# EAGLE board board (EAGLE 9.5.1)
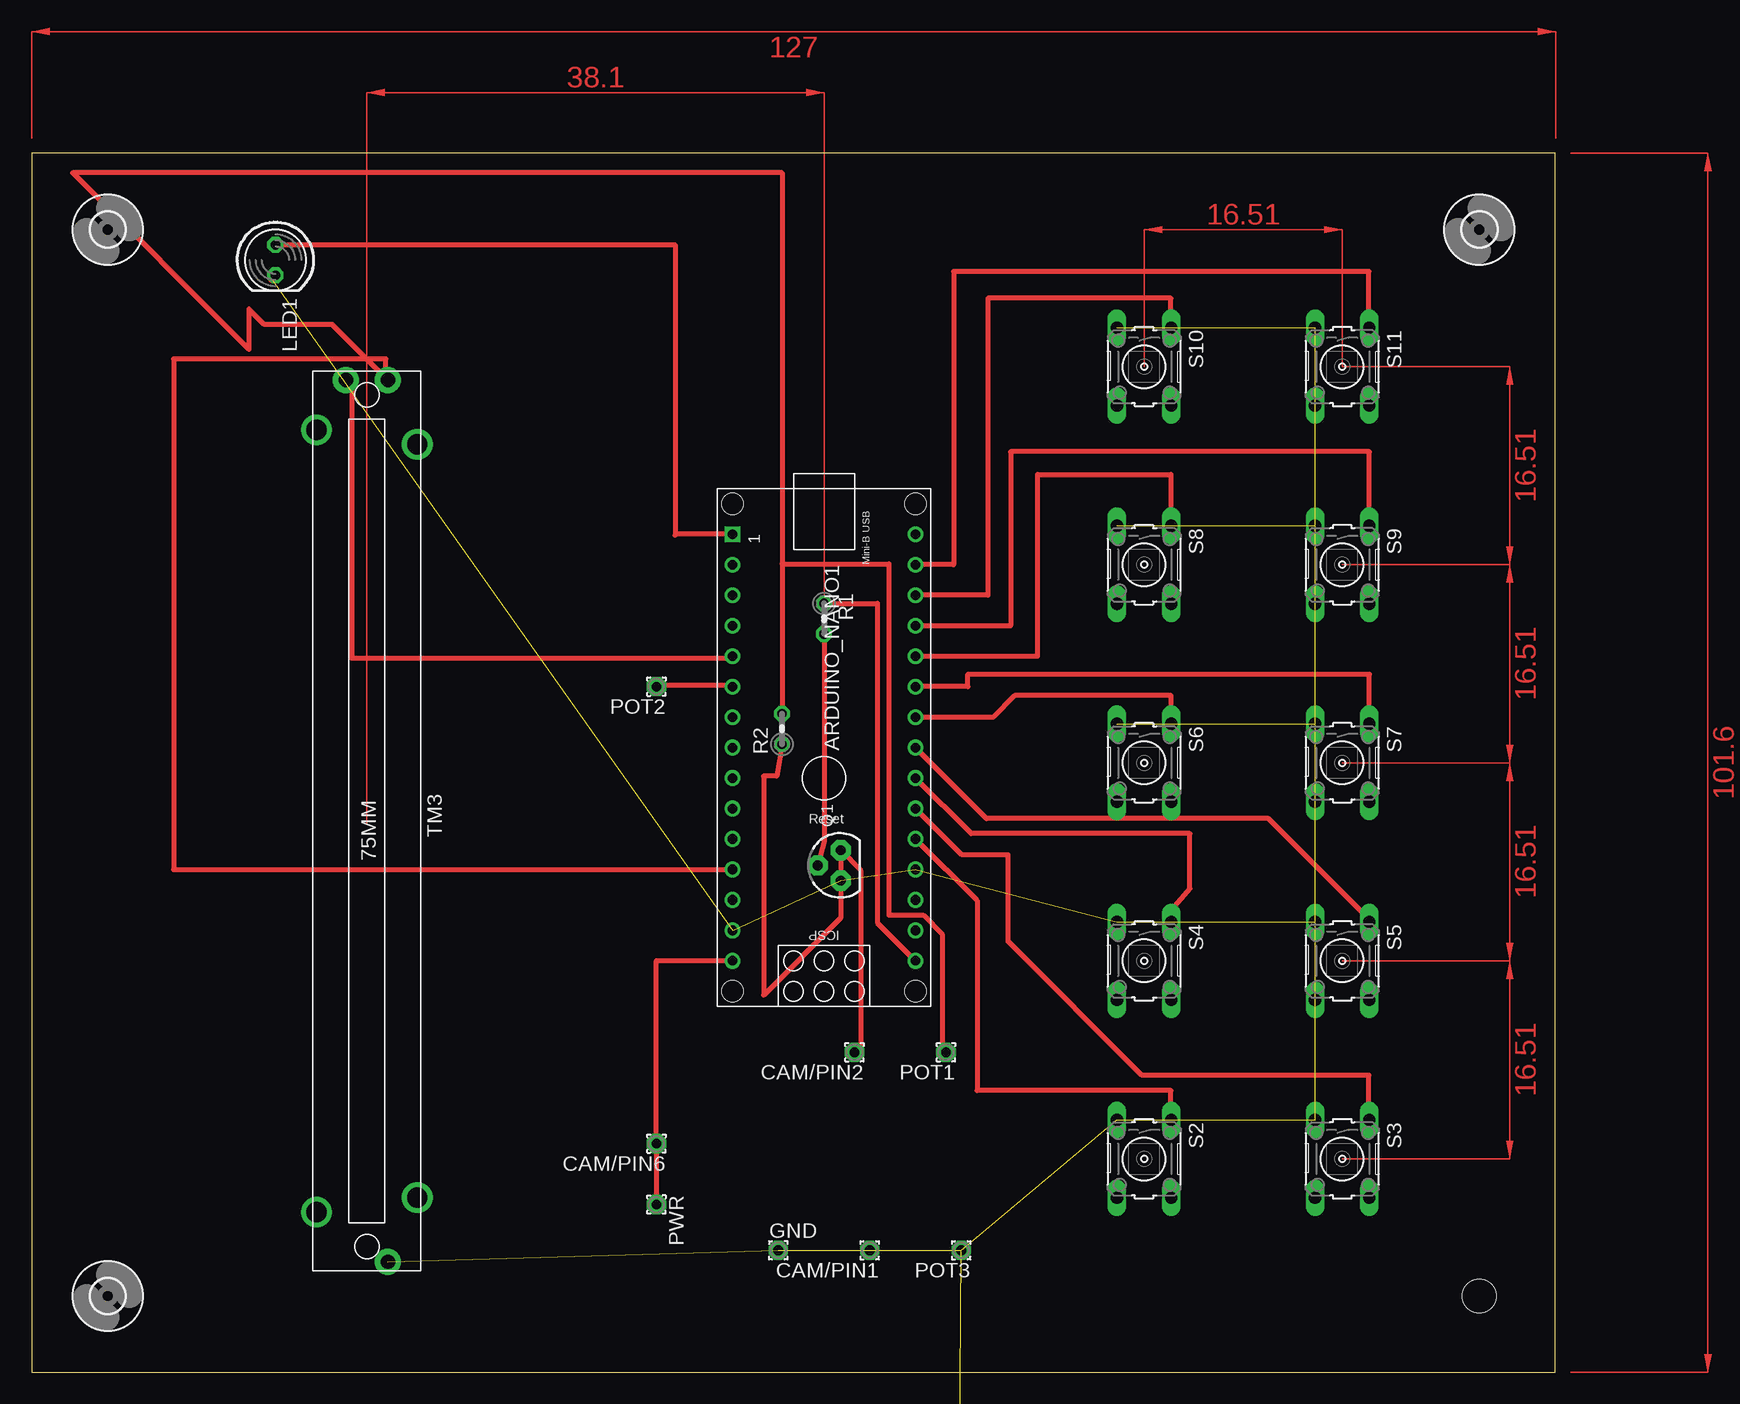
[diagram p0: board, top side]
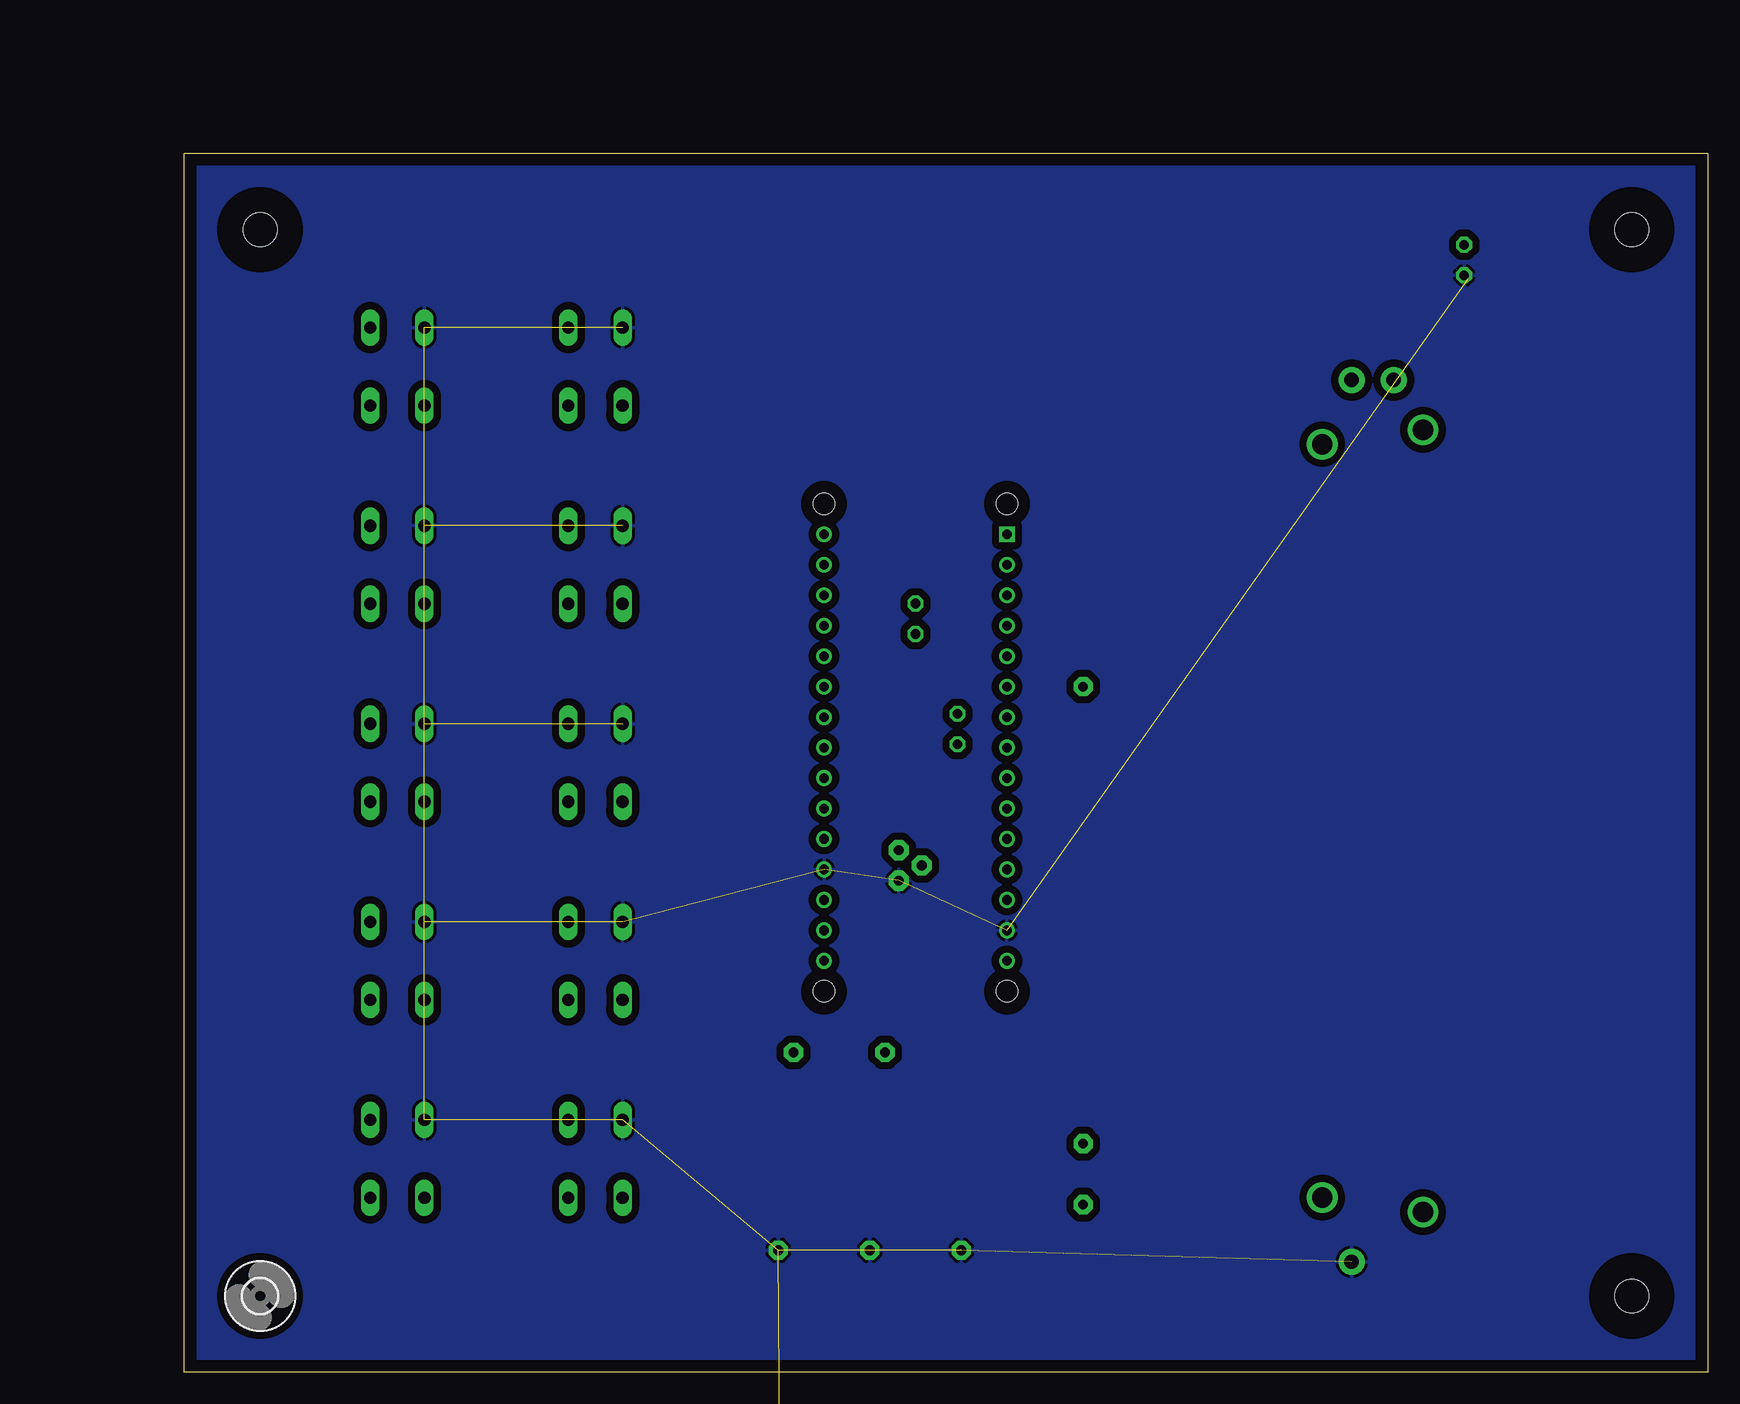
[diagram p1: board, bottom side, seen from below]

Size 126.98 x 101.6 mm. Coordinates in mm from the lower left corner, seen from the top.
Outline: 0,0 126.98,0 126.98,101.6 0,101.6 0,0
Copper layers (1*16): Top 0.035mm / dielectric 1.5mm / Bottom 0.035mm
Design rules "default": minimum track width 6mil, minimum drill 0.35mm, track to track 6mil, track to pad 6mil, pad to pad 6mil, via to via 6mil, smd to smd 6mil, copper to edge 40mil, drill to drill 6mil, minimum pad ring 10mil, minimum via ring 8mil, stop-mask expansion 4mil, vias tented up to drill 0mil, thermal gap 10mil
Net classes: 0 default: width 0.406 mm, clearance 0.406 mm; 1 ground: width 0.61 mm, clearance 0.61 mm

## Footprints (pad centres in the part's own frame; a part is rotated, then mirrored left to right if it is on the bottom)
ARDUINO_NANO = drill 0.8 square: 1 -20.32,-7.62 | drill 0.8: 2 -17.78,-7.62; 3 -15.24,-7.62; 4 -12.7,-7.62; 5 -10.16,-7.62; 6 -7.62,-7.62; 7 -5.08,-7.62; 8 -2.54,-7.62; 9 0,-7.62; 10 2.54,-7.62; 11 5.08,-7.62; 12 7.62,-7.62; 13 10.16,-7.62; 14 12.7,-7.62; 15 15.24,-7.62; 16 15.24,7.62; 17 12.7,7.62; 18 10.16,7.62; 19 7.62,7.62; 20 5.08,7.62; 21 2.54,7.62; 22 0,7.62; 23 -2.54,7.62; 24 -5.08,7.62; 25 -7.62,7.62; 26 -10.16,7.62; 27 -12.7,7.62; 28 -15.24,7.62; 29 -17.78,7.62; 30 -20.32,7.62 | hole 1.778: -22.86,-7.62; -22.86,7.62; 17.78,7.62; 17.78,-7.62
1,6/0,8 = drill 0.813 pad 1.6 octagon: 1 0,0
D-25F = drill 1.016 pad 1.575 octagon: 1 16.764,1.397; 2 13.97,1.397; 3 11.176,1.397; 4 8.382,1.397; 5 5.588,1.397; 6 2.794,1.397; 7 0,1.397; 8 -2.794,1.397; 9 -5.588,1.397; 10 -8.382,1.397; 11 -11.176,1.397; 12 -13.97,1.397; 13 -16.764,1.397; 14 15.367,-1.397; 15 12.573,-1.397; 16 9.779,-1.397; 17 6.985,-1.397; 18 4.191,-1.397; 19 1.397,-1.397; 20 -1.397,-1.397; 21 -4.191,-1.397; 22 -6.985,-1.397; 23 -9.779,-1.397; 24 -12.573,-1.397; 25 -15.367,-1.397 | hole 4.115: 23.368,0; -23.368,0
LED5MM = drill 0.813 octagon: A -1.27,0; K 1.27,0
TO92 = drill 0.813 pad 1.676 octagon: 1 1.27,0; 2 0,1.905; 3 -1.27,0
0204V = drill 0.813 octagon: 1 -1.27,0; 2 1.27,0
47100226814X_PANELTHICKNESS1.5MM = drill 0.8: 1 3,0; 2 -3,0
B3F-10XX = drill 1.016 long: 1 -3.251,2.261; 2 3.251,2.261; 3 -3.251,-2.261; 4 3.251,-2.261
SLIDEPOT-75 = drill 1.2 pad 2.184: A -36.99,1.75; B 36.514,1.75; WIPER -36.99,-1.75 | drill 1.7 pad 2.54: P$1 -31.64,4.2; P$2 31.164,4.2; P$3 -32.84,-4.2; P$4 32.364,-4.2
2,8 = hole 2.8: 0,0
DIN8 = drill 0.6 square: P$1 -1.27,0; P$2 0,0; P$3 1.27,0; P$4 2.54,0; P$5 2.54,-1.27; P$6 1.27,-1.27; P$7 0,-1.27; P$8 -1.27,-1.27

## Placement (x,y rotation side)
ARDUINO_NANO1  [ARDUINO_NANO]  66.04,49.53 270 top
CAM/PIN1  [1,6/0,8]  69.85,10.16 180 top
CAM/PIN2  [1,6/0,8]  68.58,26.67 180 top
CAM/PIN6  [1,6/0,8]  52.07,19.05 180 top
CON1  [D-25F]  40.12,-12.86 0 top  (outside the outline)
GND  [1,6/0,8]  62.23,10.16 0 top
LED1  [LED5MM]  20.32,92.71 270 top
POT1  [1,6/0,8]  76.2,26.67 180 top
POT2  [1,6/0,8]  52.07,57.15 180 top
POT3  [1,6/0,8]  77.47,10.16 180 top
PWR  [1,6/0,8]  52.07,13.97 270 top
Q1  MPSA42  [TO92]  67.43,42.25 90 top
R1  [0204V]  66.04,62.81 270 top
R2  [0204V]  62.54,53.62 90 top
S1  471002268142_PANELTHICKNESS1.5MM  [47100226814X_PANELTHICKNESS1.5MM]  80.23,-22.63 0 top  (outside the outline)
S2  [B3F-10XX]  92.71,17.78 270 top
S3  [B3F-10XX]  109.22,17.78 270 top
S4  [B3F-10XX]  92.71,34.29 270 top
S5  [B3F-10XX]  109.22,34.29 270 top
S6  [B3F-10XX]  92.71,50.8 270 top
S7  [B3F-10XX]  109.22,50.8 270 top
S8  [B3F-10XX]  92.71,67.31 270 top
S9  [B3F-10XX]  109.22,67.31 270 top
S10  [B3F-10XX]  92.71,83.82 270 top
S11  [B3F-10XX]  109.22,83.82 270 top
TM3  [SLIDEPOT-75]  27.94,45.72 270 top
U$1  [2,8]  6.35,95.25 0 top
U$2  [2,8]  6.35,6.35 0 top
U$3  [2,8]  120.65,95.25 0 top
U$4  [2,8]  120.65,6.35 0 bottom
X1  DIN8  [DIN8]  4.11,-12.6 0 top  (outside the outline)
X2  DIN8  [DIN8]  4.11,-9.77 0 top  (outside the outline)

## Library data of the parts
ARDUINO_NANO1 = ArduinoNanoV30
CAM/PIN1 CAM/PIN2 CAM/PIN6 GND POT1-POT3 PWR = wirepad
CON1 = db25
LED1 = led
Q1 = MPSA42; AVAILABILITY: Unavailable; DESCRIPTION: TRANSISTOR, NPN, TO-92; Transistor Type: Bipolar; Transistor Polarity: NPN; Collector-to-Emitter Breakdown Voltage: 3...; MF: Central Semiconductor; MP: MPSA42; PACKAGE: TO-92 Multicomp; PRICE: None
R1 R2 = rcl; SPICEPREFIX: R
S1 = power_switch; AVAILABILITY: Unavailable; DESCRIPTION: Rocker Switch SPST 10A _AC/DC_ 250V Panel Mount, Snap-In; MF: Würth Elektronik; MP: 471002268142; PACKAGE: None; PRICE: None
S2-S11 = switch-omron; MPN: B3F-1000; OC_FARNELL: 176432; OC_NEWARK: 36M3542
TM3 = Bourns PTA series
U$1-U$4 = holes
X1 X2 = con-din8

## Nets
GND [ground]: ARDUINO_NANO1.14 ARDUINO_NANO1.19 CAM/PIN1.1 GND.1 LED1.K POT3.1 Q1.3 S1.2 S2.3 S3.3 S4.3 S5.3 S6.3 S7.3 S8.3 S9.3 S10.3 S11.3 TM3.B
N$1: X1.P$7
N$2: ARDUINO_NANO1.12 POT1.1 R2.2 TM3.A
N$3: ARDUINO_NANO1.20 S2.1
N$4: ARDUINO_NANO1.21 S3.1
N$5: ARDUINO_NANO1.22 S4.1
N$6: ARDUINO_NANO1.23 S5.1
N$7: ARDUINO_NANO1.24 S6.1
N$8: ARDUINO_NANO1.25 S7.1
N$9: ARDUINO_NANO1.26 S8.1
N$10: ARDUINO_NANO1.27 S9.1
N$11: ARDUINO_NANO1.28 S10.1
N$12: ARDUINO_NANO1.29 S11.1
N$13: ARDUINO_NANO1.15 CAM/PIN6.1 PWR.1
N$14: ARDUINO_NANO1.16 R1.1
N$15: Q1.2 R1.2
N$16: ARDUINO_NANO1.5 TM3.WIPER
N$17: ARDUINO_NANO1.6 POT2.1
N$18: CAM/PIN2.1 Q1.1 R2.1
N$19: ARDUINO_NANO1.1 LED1.A
N$20: X1.P$2
N$21: X1.P$1
N$22: CON1.2 X2.P$2
N$23: CON1.6 X2.P$7
N$24: CON1.1 X2.P$1
N$25: S1.1

## Tracks (layer width: path | path; a pad name or v marks a point on that pad's centre or on a via)
GND  (18 unrouted)
  Top 0.61: LED1.K 20,91.12
  pour Bottom (isolate 0.406): 0,101.6 0,0 127,0 127,101.6
  pour Bottom: 0,101.6 127,101.6 127,0 0,0
  pour Bottom: 0,101.6 127,101.6 127,0 0,0
  pour Bottom: 0,101.6 127,101.6 127,0 0,0
  pour Bottom: 0,101.6 127,101.6 127,0 0,0
  pour Bottom: 0,101.6 0,0 127,0 127,101.6
N$2
  Top 0.406: ARDUINO_NANO1.12 11.85,41.91 11.85,84.45 29.53,84.45 29.53,82.87 TM3.A 25.06,87.34 19.4,87.34 18.12,88.62 18.12,85.28 3.41,99.98 62.55,99.98 62.55,67.39 | R2.2 62.55,52.96 62.55,67.39 | POT1.1 75.88,26.99 75.88,36.51 74.3,38.1 71.44,38.1 71.44,67.39 62.55,67.39
N$3
  Top 0.406: ARDUINO_NANO1.20 78.8,39.31 78.8,23.48 94.93,23.48 94.93,21.27 S2.1
N$4
  Top 0.406: ARDUINO_NANO1.21 77.52,43.13 81.38,43.13 81.38,35.91 92.53,24.77 111.44,24.77 111.44,21.27 S3.1
N$5
  Top 0.406: ARDUINO_NANO1.22 78.29,44.9 96.52,44.9 96.52,40.32 94.97,38.53 S4.1
N$6
  Top 0.406: ARDUINO_NANO1.23 79.58,46.16 103.07,46.16 111.44,37.78 S5.1
N$7
  Top 0.406: ARDUINO_NANO1.24 80.12,54.61 81.91,56.39 94.97,56.39 S6.1
N$8
  Top 0.406: S7.1 111.48,58.18 78.03,58.18 78.03,57.15 ARDUINO_NANO1.25
N$9
  Top 0.406: ARDUINO_NANO1.26 83.83,59.69 83.83,74.83 94.97,74.83 S8.1
N$10
  Top 0.406: ARDUINO_NANO1.27 81.6,62.23 81.6,76.73 111.48,76.73 S9.1
N$11
  Top 0.406: ARDUINO_NANO1.28 79.69,64.77 79.69,89.53 94.93,89.53 94.93,87.31 S10.1
N$12
  Top 0.406: ARDUINO_NANO1.29 76.83,67.31 76.83,91.76 111.44,91.76 111.44,87.31 S11.1
N$13
  Top 0.406: ARDUINO_NANO1.15 52.07,34.29 CAM/PIN6.1 PWR.1
N$14
  Top 0.406: ARDUINO_NANO1.16 70.48,37.47 70.48,64.08 R1.1
N$15
  Top 0.406: R1.2 66.04,44.27 Q1.2
N$16
  Top 0.406: TM3.WIPER 26.35,82.55 26.67,82.23 26.67,59.69 26.62,59.54 58.32,59.54 ARDUINO_NANO1.5
N$17
  Top 0.406: ARDUINO_NANO1.6 58.32,57.3 52.22,57.3 POT2.1
N$18
  Top 0.406: R2.1 62.08,49.68 61,49.68 61,31.43 67.43,37.86 Q1.1 69.09,41.85 69.09,27.18 CAM/PIN2.1
N$19
  Top 0.406: ARDUINO_NANO1.1 53.73,69.85 53.63,69.75 53.63,93.98 LED1.A
N$22  (1 unrouted)
N$23  (1 unrouted)
N$24  (1 unrouted)
(copper drawn outside any net)
  shapes: Top area x8